# Altium PCB Backplane_PCB_v1.PcbDoc (part 2 of 2)
Units mm, origin at the board's own origin, x right, y up, seen from the top; angles counter-clockwise.
Board outline 92.34 x 177.99 mm, 4 copper layers (Top Layer, Signal Layer 1, Internal Plane 1, Bottom Layer), stack 0.778 mm thick; 54 components, 42 nets, 299 pads, 47 vias.
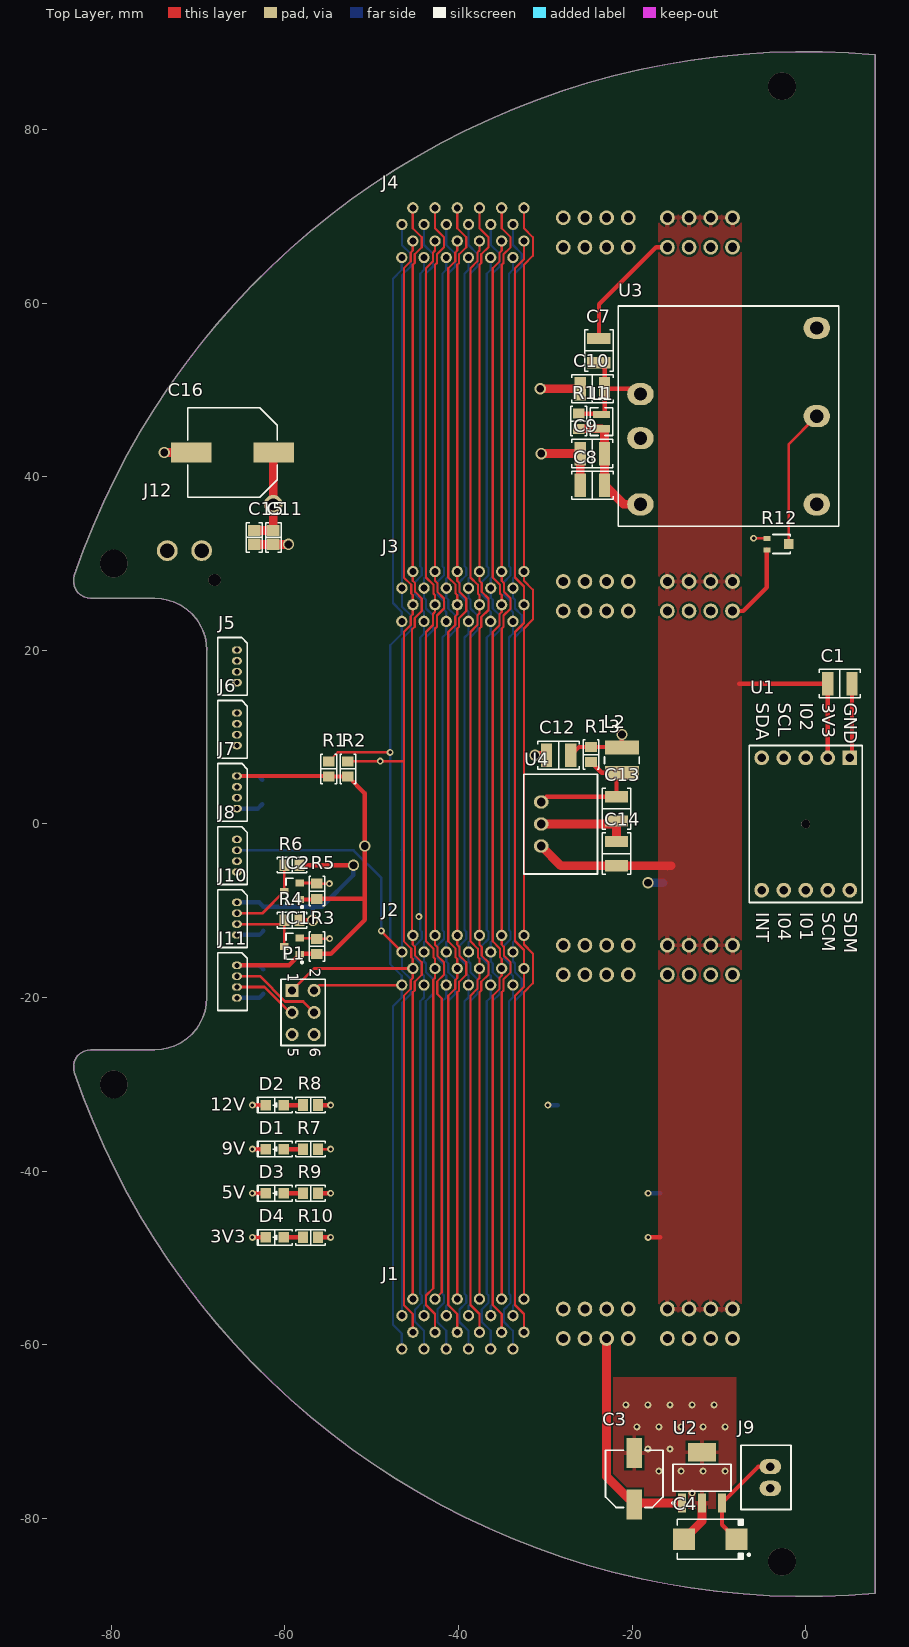
[diagram p0: Top Layer view]

## Polygon pours and split planes (outlines as drawn) (continued)
3V3 on Top Layer "Top Layer - 3V3" (solid, pour order 0): -17.018,70.194 -7.366,70.194 -7.366,-56.261 -17.018,-56.261
GND on Top Layer "Bottom Layer - GND - LDO" (solid, remove dead copper, pour order 10): -22.86,-78.867 -8.001,-78.867 -8.001,-63.754 -22.86,-63.754
GND on Internal Plane 1 (split plane): 177 vertices, not listed, extent -83.843,-88.482 7.478,88.482

## Keep-outs
Keep-Out Layer:
  the board outline again, w0.1

## Silkscreen, mask and mechanical layers (free items; w line width, h text height)
Top Overlay:
  text "12V" at -68.58,-33.02 h1.52
  text "9V" at -67.31,-38.1 h1.52
  text "5V" at -67.31,-43.18 h1.52
  text "3V3" at -68.58,-48.26 h1.52
Mechanical 1:
  lines w0.2: -61.999,-63.754 8.001,-63.754 ; -61.999,63.754 8.001,63.754

## Text inside footprints (layer, text, board x,y; h text height)
P1: Top Overlay "1" at -59.69,-17.137 h1.27 r270; Top Overlay "2" at -57.15,-16.629 h1.27 r270; Top Overlay "5" at -59.69,-25.773 h1.27 r270; Top Overlay "6" at -57.15,-25.773 h1.27 r270
U1: Top Overlay "GND" at 4.445,13.97 h1.52 r270; Top Overlay "3V3" at 1.905,13.97 h1.52 r270; Top Overlay "I02" at -0.635,13.97 h1.52 r270; Top Overlay "SCL" at -3.175,13.97 h1.52 r270; Top Overlay "SDA" at -5.715,13.97 h1.52 r270; Top Overlay "SDM" at 4.445,-10.16 h1.52 r270; Top Overlay "SCM" at 1.905,-10.16 h1.52 r270; Top Overlay "I01" at -0.635,-10.16 h1.52 r270; Top Overlay "I04" at -3.175,-10.16 h1.52 r270; Top Overlay "INT" at -5.715,-10.16 h1.52 r270